# Altium PCB state indicator.PcbDoc
Units mil, origin at the board's own origin, x right, y up, seen from the top; angles counter-clockwise.
Board outline 2365 x 2165 mil, 2 copper layers (Top Layer, Bottom Layer); 31 components, 38 nets, 115 pads, 0 vias.
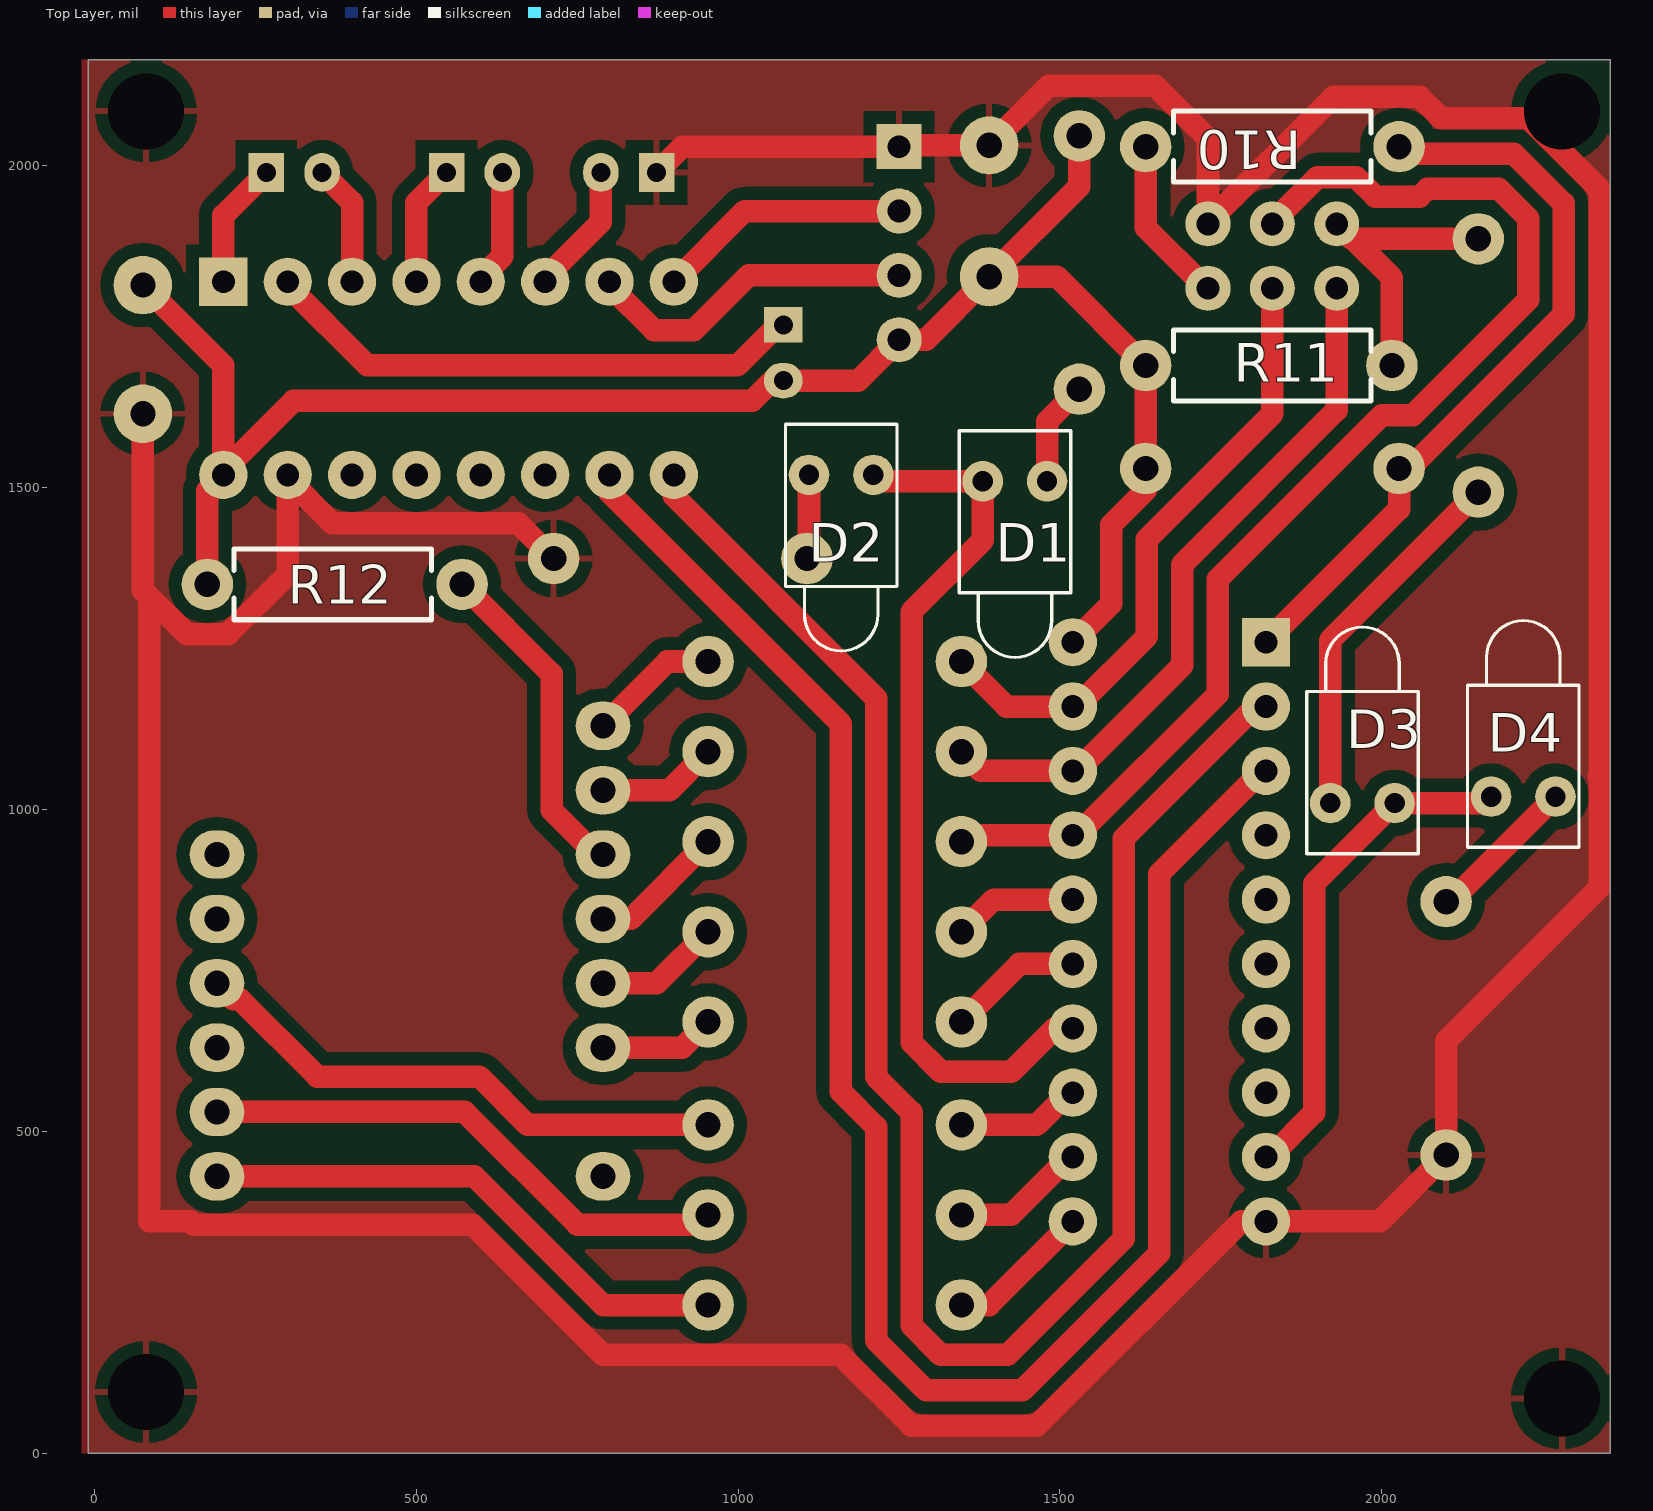
[diagram p0: Top Layer view]
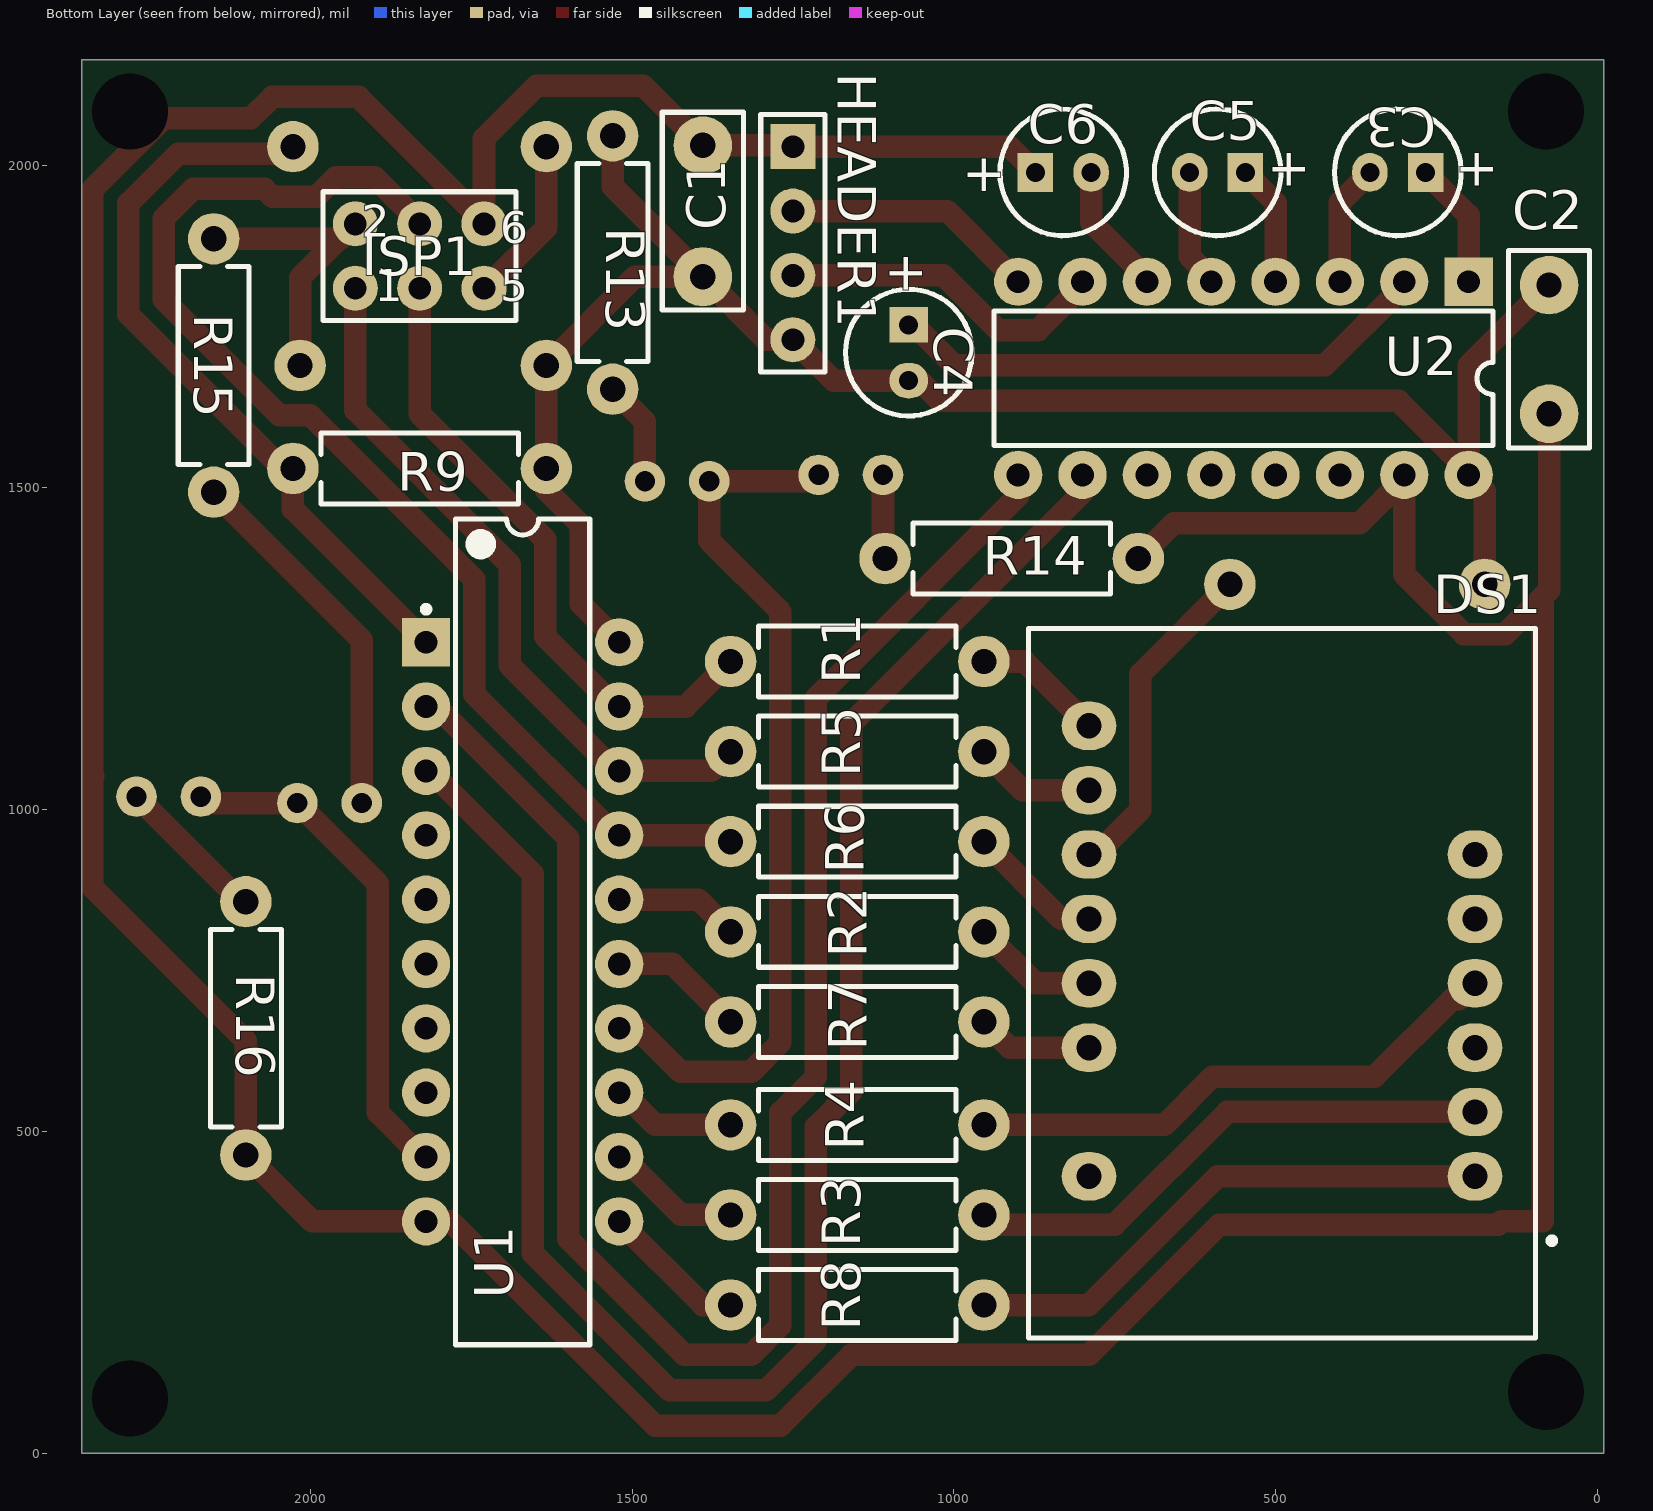
[diagram p1: Bottom Layer view, seen from below]

## Layer stack, top to bottom
Top Layer: signal copper 1.4
Dielectric: dielectric 12.6, FR-4, Dk 4.8
Bottom Layer: signal copper 1.4

## Board outline
2355,2165 2355,0 -10,0 -10,2165

## Design rules (kind name [scope] priority, off if disabled: settings)
Clearance [All] p1: gap=20
PolygonConnect [All] p1: connectstyle=Relief reliefconductorwidth=10 reliefentries=4 polygonreliefangle="90 Angle"
RoomDefinition "state indicator" [InComponentClass('state indicator')] p1: confinementstyle=ConfineIn formatcopy=TRUE lockcomponents=FALSE outline 0,0 2355,0 2355,2165 0,2165
RoutingVias [All] p1: holewidth=28 width=50 viastyle="Through Hole" minholewidth=28 minwidth=50 maxholewidth=28 maxwidth=50
SilkscreenOverComponentPads [All] p1: minsilkscreentomaskgap=10
SolderMaskExpansion [All] p1: expansion=4
Width [All] p1: maxlimit=35 minlimit=35 preferedwidth=35
27 further rules are at their usual default settings.

## Components (designator, comment, footprint, x,y, rotation, side; value= is the part's Value field where it differs from the comment)
C1 "Cap" CAPR5.08-7.8x3.2#1 1390,1930 r90 bottom
C2 "Cap" CAPR5.08-7.8x3.2#2 75,1715 r270 bottom
C3 "Cap Pol1" CAPPR2-5x6.8 310,1990 r0 bottom
C4 "Cap Pol1" CAPPR2-5x6.8 1070,1710 r270 bottom
C5 "Cap Pol1" CAPPR2-5x6.8 590,1990 r0 bottom
C6 "Cap Pol1" CAPPR2-5x6.8 830,1990 r180 bottom
D1 "LED1" LED-1 1430,1510 r270 top
D2 "LED1" LED-1 1160,1520 r270 top
D3 "LED1" LED-1 1970,1010 r90 top
D4 "LED1" LED-1 2220,1020 r90 top
DS1 "HDSP-3901" N-13 490,730 r0 bottom
HEADER1 "Header 4" HDR1X4 1250,2030 r270 bottom
ISP1 "Header 3X2" HDR2X3 1930,1810 r180 bottom
R1 "es Semi" RES10-7.8X2.8#1 1150,1230 r0 bottom
R2 "Res Semi" RES10-7.8X2.8#1 1150,810 r0 bottom
R3 "Res Semi" RES10-7.8X2.8#1 1150,370 r0 bottom
R4 "Res Semi" RES10-7.8X2.8#1 1150,510 r0 bottom
R5 "Res Semi" RES10-7.8X2.8#1 1150,1090 r0 bottom
R6 "Res Semi" RES10-7.8X2.8#1 1150,950 r0 bottom
R7 "Res Semi" RES10-7.8X2.8#1 1150,670 r0 bottom
R8 "Res Semi" RES10-7.8X2.8#1 1150,230 r0 bottom
R9 "Res Semi" RES10-7.8X2.8#1 1830,1530 r0 bottom
R10 "Res Semi" RES10-7.8X2.8#1 1830,2030 r180 top
R11 "Res Semi" RES10-7.8X2.8#2 1830,1690 r180 top
R12 "Res Semi" RES10-7.8X2.8#3 370,1350 r0 top
R13 "Res Semi" RES10-7.8X2.8#1 1530,1850 r270 bottom
R14 "Res Semi" RES10-7.8X2.8#1 910,1390 r0 bottom
R15 "Res Semi" RES10-7.8X2.8#1 2150,1690 r270 bottom
R16 "Res Semi" RES10-7.8X2.8#1 2100,660 r90 bottom
U1 "AT90S2313-10PC" DIP-20/D32.6 1670,810 r180 bottom
U2 "MAX232N" N016 550,1670 r0 bottom

## Footprints (in the part's own frame and the unit in brackets; to place one, negate y for a bottom-side part, rotate by r counter-clockwise, add the part's x,y. Pads: shape width x height; smd on the part's side, far side on the other; paste and mask are expansions set on the pad)
CAPPR2-5x6.8 [mm]
  rect 1.402x1.529 hole 0.75: 1(-1.098,0)
  oval 1.402x1.529 hole 0.75: 2(1.102,0)
  silkscreen extent -2.5,-2.5 2.5,2.5
CAPR5.08-7.8x3.2#1 [mm]
  oval 2.336x2.31 hole 1: 1(-2.591,0)
  oval 2.285x2.31 hole 1: 2(2.591,0)
  silkscreen extent -3.9,-1.6 3.9,1.6
CAPR5.08-7.8x3.2#2 [mm]
  round 2.31 hole 1: 1(-2.54,0) 2(2.54,0)
  silkscreen extent -3.9,-1.6 3.9,1.6
DIP-20/D32.6 [mm]
  rect 1.905x1.905 hole 0.9: 1(-3.81,11.43)
  round 1.905 hole 0.9: 2(-3.81,8.89) 3(-3.81,6.35) 4(-3.81,3.81) 5(-3.81,1.27) 6(-3.81,-1.27) 7(-3.81,-3.81) 8(-3.81,-6.35) 9(-3.81,-8.89) 10(-3.81,-11.43) 11(3.81,-11.43) 12(3.81,-8.89) 13(3.81,-6.35) 14(3.81,-3.81) 15(3.81,-1.27) 16(3.81,1.27) 17(3.81,3.81) 18(3.81,6.35) 19(3.81,8.89) 20(3.81,11.43)
  silkscreen extent -3.94,-16.3 2.65,16.3, body extent -3.6,-16.25 3.6,16.25, height 5.08
HDR1X4 [mil]
  rect 70x70 hole 35.43: 1(0,0)
  round 70 hole 35.43: 2(100,0) 3(200,0) 4(300,0)
  silkscreen extent -50,-50 350,50
HDR2X3 [mil]
  round 70 hole 35.43: 1(0,0) 2(0,100) 3(100,0) 4(100,100) 5(200,0) 6(200,100)
  silkscreen extent -50,-50 250,150
LED-1 [mm] "Typical RED GaAs LED; 2 Leads"
  round 1.6 hole 0.8: 1(0,1.27) 2(0,-1.27)
  silkscreen extent -2,-2.2 6.95,2.2
N016 [mm]
  rect 1.905x1.905 hole 0.9: 1(-8.89,-3.81)
  round 1.905 hole 0.9: 2(-6.35,-3.81) 3(-3.81,-3.81) 4(-1.27,-3.81) 5(1.27,-3.81) 6(3.81,-3.81) 7(6.35,-3.81) 8(8.89,-3.81) 9(8.89,3.81) 10(6.35,3.81) 11(3.81,3.81) 12(1.27,3.81) 13(-1.27,3.81) 14(-3.81,3.81) 15(-6.35,3.81) 16(-8.89,3.81)
  silkscreen extent -9.85,-2.65 9.85,2.65
N-13 [mil]
  oval 85x75 hole 39.37: 2(-300,300) 3(-300,200) 4(-300,100) 5(-300,0) 6(-300,-100) 7(-300,-200) 10(300,-400) 11(300,-300) 12(300,-200) 13(300,-100) 14(300,0) 15(300,100) 75mil(300,300)
  silkscreen extent -424,-551 394,551
RES10-7.8X2.8#1 [mil]
  round 80 hole 39.37: 1(-196.85,0) 2(196.85,0)
  silkscreen extent -154,-55 154,55
RES10-7.8X2.8#2 [mil]
  round 80 hole 39.37: 1(-185.85,0) 2(196.85,0)
  silkscreen extent -154,-55 154,55
RES10-7.8X2.8#3 [mil]
  round 80 hole 39.37: 1(-194.85,0) 2(200.85,0)
  silkscreen extent -154,-55 154,55

## Part data
C1 C2: "Capacitor"
C3 C4 C5 C6: "Polarized Capacitor (Radial)"
D1 D2 D3 D4: "Typical RED GaAs LED"
DS1: "20.32 mm Gray Package HER 7-Segment Display: CA, RH DP"
HEADER1: "Header, 4-Pin"
ISP1: "Header, 3-Pin, Dual row"
R1: library part "Res Semi", "Semiconductor Resistor"
R2 R3 R4 R5 R6 R7 R8 R9 R10 R11 R12 R13 R14 R15 R16: "Semiconductor Resistor"
U1: "8-Bit AVR Microcontroller with 2K Bytes of In-System Programmable Flash Memory"
U2: "Dual EIA-232 Driver/Receiver"

## Free pads (board coordinates)
  round 0 hole 118.11: ""(80,95) ""(80,2085) ""(2280,85) ""(2280,2085)

## Nets (pads, with @x,y where several pads share a name; then routed paths per layer and width w, separated by ;. In a path a pad name is that pad's centre, name@x,y a point inside that pad or via, vN(x,y) a via of type N, cw(c..) or ccw(c..) an arc to the next point about the centre after c; other vN are vias at no path point)
GND: C1.2 C2.2 C6.1 HEADER1.1 ISP1.6 pad. R14.1 R16.1 U1.10 U2.15 | length 8015.9
  Top Layer w35: C2.2 75,1340.55 85,1330.55 ; U2.15 U2.15@300,1513.93 ; R14.1 658.15,1445 368.93,1445 U2.15@300,1513.93 ; C6.1@873.23,1997.96 C6.1 913.23,2030 HEADER1.1 1252,2032 C1.2 ; C1.2@1405.55,2032 C1.2 ; ISP1.6 ISP1.6@1730,1912.53 ; 1976.85,360 1950,360 ; 2337.5,1051.57 2339,1050.08 ; 2337.5,1964.52 2295.48,2006.54 ; 85,1330.55 85,360 148.93,360 153.93,355 587.22,355 789.72,152.5 1159.19,152.5 1269.19,42.5 1464.13,42.5 1781.63,360 U1.10 1950,360 ; 85,1330.55 143.05,1272.5 207.25,1272.5 300,1365.25 U2.15@300,1513.93 ; C1.2 1482.35,2124.35 1648.4,2124.35 1730,2042.75 ISP1.6@1730,1912.53 ; ISP1.6@1730,1912.53 1924.97,2107.5 2058.95,2107.5 2092.1,2074.35 2227.66,2074.35 2295.48,2006.54 ; 1950,360 1996.85,360 R16.1 2100,640.35 2339,879.35 2339,1050.08 ; 2295.48,2006.54 2339,1963.02 2339,1050.08
MOTORS_LED: D1.2 D2.1 U1.14 | length 1389.5
  Top Layer w35: D2.1 1220,1510 D1.2 1380,1418.15 1269.35,1307.5 1269.35,637.9 1314.75,592.5 1424.35,592.5 1491.85,660 1513.93,660 U1.14
NetC3_1: C3.1 U2.1 | length 197.7
  Top Layer w35: U2.1 200,1923.23 C3.1
NetC3_2: C3.2 U2.3 | length 189.3
  Top Layer w35: C3.2 400,1943.39 U2.3
NetC4_1: C4.1 U2.2 | length 853.6
  Top Layer w35: U2.2 300,1813.93 423.93,1690 998.81,1690 1062.04,1753.23 C4.1
NetC5_1: C5.1 U2.4 | length 191.9
  Top Layer w35: U2.4 500,1943.23 C5.1 C5.1@545,1988.23
NetC5_2: C5.2 U2.5 | length 183.8
  Top Layer w35: U2.5 600,1826.07 633.39,1859.45 C5.2
NetC6_2: C6.2 U2.6 | length 205.9
  Top Layer w35: U2.6 700,1826.07 786.61,1912.68 C6.2
NetD1_1: D1.1 R13.2 | length 163.9
  Top Layer w35: D1.1 1480,1603.15 R13.2
NetD2_2: D2.2 R14.2 | length 131.3
  Top Layer w35: R14.2 1110,1393.15 D2.2
NetD3_1: D3.1 R15.2 | length 578.4
  Top Layer w35: D3.1 1920,1263.15 R15.2
NetD4_2: D4.2 R16.2 | length 257.6
  Top Layer w35: R16.2@2100,876.85 R16.2 2106.85,856.85 D4.2
NetDS1_2: DS1.2 R8.1 | length 846
  Top Layer w35: DS1.2 590,430 790,230 R8.1
NetDS1_3: DS1.3 R3.1 | length 841.9
  Top Layer w35: DS1.3 575,530 750,355 938.15,355 R3.1
NetDS1_5: DS1.5 R4.1 | length 854.3
  Top Layer w35: DS1.5 215,705 226.07,705 346.07,585 597.78,585 672.78,510 R4.1
NetDS1_10: DS1.10 R1.1 | length 227.7
  Top Layer w35: DS1.10@813.15,1130 DS1.10 890,1230 R1.1
NetDS1_11: DS1.11 R5.1 | length 188
  Top Layer w35: DS1.11 893.15,1030 R5.1
NetDS1_12: DS1.12 R12.2 | length 517.3
  Top Layer w35: R12.2 710,1210.85 710,998.93 778.93,930 DS1.12
NetDS1_13: DS1.13 R6.1 | length 236
  Top Layer w35: DS1.13@813.15,830 DS1.13 833.15,830 R6.1
NetDS1_14: DS1.14 R2.1 | length 196.3
  Top Layer w35: DS1.14 873.15,730 R2.1
NetDS1_15: DS1.15 R7.1 | length 179.7
  Top Layer w35: DS1.15 913.15,630 R7.1
NetISP1_5: ISP1.5 R10.2 | length 261.6
  Top Layer w35: R10.2 1633.15,1904.32 1727.47,1810 ISP1.5
PC_LED: D3.2 D4.1 U1.9 | length 776.4
  Top Layer w35: U1.9 1826.07,460 1895,528.93 1895,885 D3.2 D4.1@2160,1010
R232: HEADER1.2 U2.8 | length 395.6
  Top Layer w35: U2.8 1010,1930 HEADER1.2
RESET: R9.2 R10.1 U1.1 | length 1175.1
  Top Layer w35: U1.1 2026.85,1466.85 R9.2 2043.23,1530 2282.5,1769.27 2282.5,1941.73 2204.88,2019.35 2037.5,2019.35 R10.1
RTINY: U1.2 U2.9 | length 2826.4
  Top Layer w35: U2.9 900,1487.25 1214.35,1172.9 1214.35,584.47 1269.35,529.47 1269.35,197.9 1314.75,152.5 1418.57,152.5 1599.42,333.36 1599.42,955.58 1803.85,1160 U1.2
SEG_A: R8.2 U1.11 | length 207
  Top Layer w35: R8.2@1366.85,230 1390,230 U1.11
SEG_B: R7.2 U1.15 | length 216.5
  Top Layer w35: R7.2 1436.85,760 U1.15 U1.15@1513.93,760
SEG_C_MOSI: ISP1.4 R6.2 U1.17 | length 1926.2
  Top Layer w35: R6.2 1356.85,960 U1.17 1526.07,960 1745,1178.93 1745,1357.75 1999.75,1612.5 2047.95,1612.5 2227.5,1792.05 2227.5,1918.95 2182.1,1964.35 2070.8,1964.35 2058.95,1952.5 1990.03,1952.5 1960.03,1982.5 1899.97,1982.5 1830,1912.53 ISP1.4
SEG_D_MISO: ISP1.1 R5.2 U1.18 | length 1109
  Top Layer w35: R5.2 1376.85,1060 U1.18 1526.07,1060 1690,1223.93 1690,1380.53 1930,1620.53 ISP1.1
SEG_DP_SCK: ISP1.3 R1.2 U1.19 | length 984.1
  Top Layer w35: R1.2 1416.85,1160 U1.19 1526.07,1160 1635,1268.93 1635,1420 1830,1615 ISP1.3
SEG_E: R4.2 U1.13 | length 173.9
  Top Layer w35: R4.2@1366.85,510 1463.93,510 1513.93,560 U1.13
SEG_F: R3.2 U1.12 | length 190.4
  Top Layer w35: R3.2@1366.85,370 1423.93,370 1513.93,460 U1.12
SEG_G: R2.2 U1.16 | length 215.1
  Top Layer w35: R2.2 1396.85,860 U1.16 U1.16@1505,845
T232: HEADER1.3 U2.7 | length 519.8
  Top Layer w35: U2.7 800,1813.93 868.93,1745 931.07,1745 1016.07,1830 HEADER1.3
TTINY: U1.3 U2.10 | length 2898.6
  Top Layer w35: U2.10 800,1492.75 1159.35,1133.4 1159.35,561.69 1214.35,506.69 1214.35,175.12 1291.97,97.5 1441.35,97.5 1654.42,310.58 1654.42,900.49 1813.93,1060 U1.3
VC: ISP1.2 R11.1 R15.1 | length 486.6
  Top Layer w35: R11.1 2015.85,1826.68 ISP1.2@1955.68,1886.85 ; R15.1 ISP1.2@1955.68,1886.85 ; ISP1.2@1955.68,1886.85 1953.15,1886.85 ISP1.2 1932.53,1910 ISP1.2@1955.68,1886.85
VCC: C1.1 C2.1 C4.2 HEADER1.4 R9.1 R11.2 R12.1 R13.1 U1.20 U2.16 | length 2896.2
  Top Layer w35: C2.1 200,1690 U2.16@200,1526.07 ; R12.1 175.15,1495.15 U2.16 U2.16@200,1526.07 ; U1.20 1580,1320 1580,1442.78 1633.15,1495.93 R9.1 R11.2 1495.15,1828 C1.1 ; R13.1 1530,1968 C1.1 ; U2.16@200,1526.07 308.93,1635 1021.59,1635 1053.21,1666.61 C4.2 1186.61,1666.61 HEADER1.4 1292,1730 C1.1
pads on no net: DS1.4 DS1.6 DS1.7 DS1.75mil U1.4 U1.5 U1.6 U1.7 U1.8 U2.11 U2.12 U2.13 U2.14

## Polygon pours and split planes (outlines as drawn)
GND on Top Layer "Top Layer-No Net" (solid, remove dead copper, pour order 1000): -20,2165 2355,2165 2355,0 -20,0

## Text inside footprints (layer, text, board x,y; h text height)
C3: Bottom Overlay "+" at 153.5,2019.53 h59.06 r180
C4: Bottom Overlay "+" at 1099.53,1866.5 h59.06 r90
C5: Bottom Overlay "+" at 445,2020 h59.06 r180
C6: Bottom Overlay "+" at 986.5,1960.47 h59.06
ISP1: Bottom Overlay "1" at 1900,1790 h50; Bottom Overlay "2" at 1920,1890 h50; Bottom Overlay "5" at 1705,1790 h50; Bottom Overlay "6" at 1705,1880 h50